# Altium PCB TK104_Pulsbegrenser_Eurorack_faderboard.PcbDoc
Units mm, origin at the board's own origin, x right, y up, seen from the top; angles counter-clockwise.
Board outline 15.5 x 62 mm, 2 copper layers (Top Layer, Bottom Layer), stack 1.871 mm thick; 1 components, 4 nets, 10 pads, 1 vias.
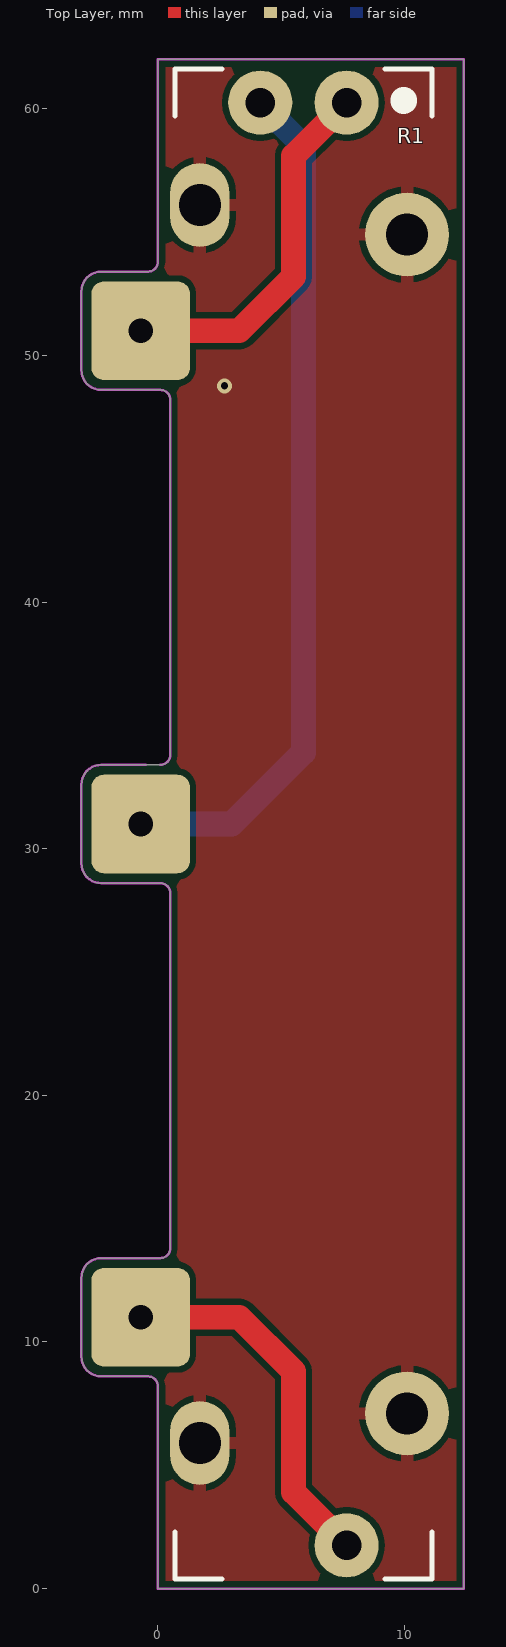
[diagram p0: Top Layer view]
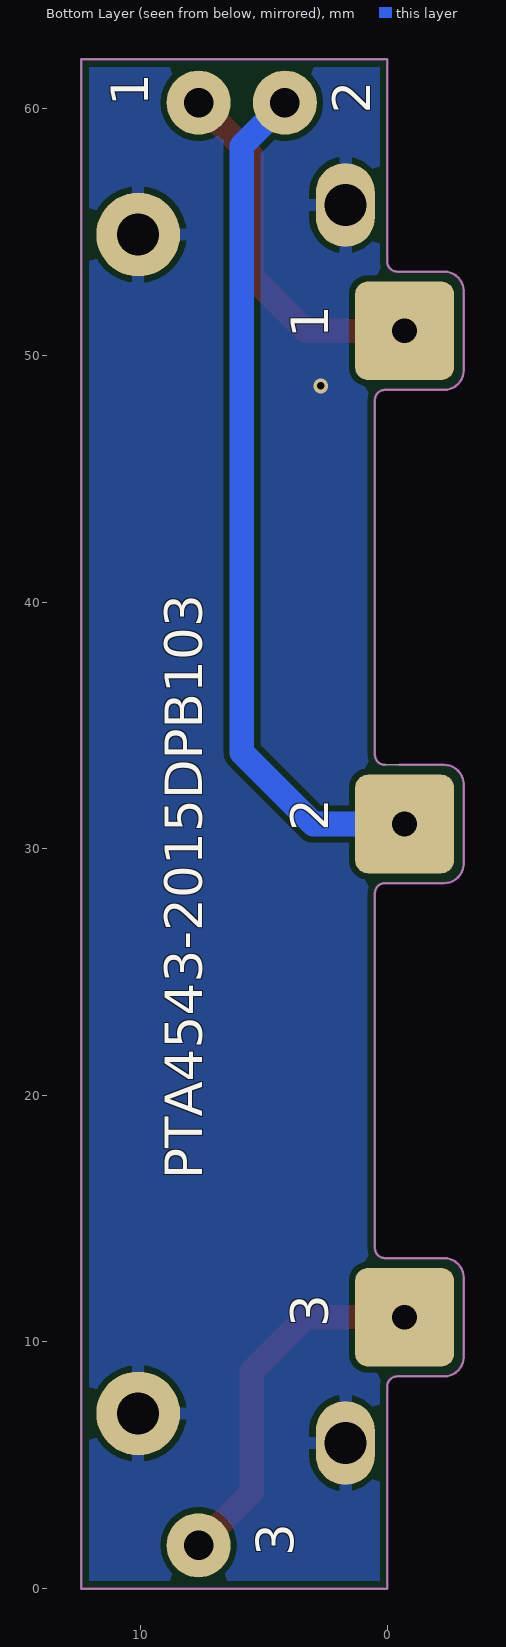
[diagram p1: Bottom Layer view, seen from below]

## Layer stack, top to bottom
Top Solder: solder mask 0.0102, Solder Resist, Dk 3.5
Top Layer: signal copper 0.0356
Dielectric 1: dielectric 1.8, FR-4, Dk 4.8
Bottom Layer: signal copper 0.0356
Bottom Solder: solder mask 0.0102, Solder Resist, Dk 3.5

## Board outline
-2.3,8.6 cw(c-2.3,9.4) -3.1,9.4 -3.1,12.6 cw(c-2.3,12.6) -2.3,13.4 0.1,13.4 ccw(c0.1,13.8) 0.5,13.8 0.5,28.2 ccw(c0.1,28.2) 0.1,28.6 -2.3,28.6 cw(c-2.3,29.4) -3.1,29.4 -3.1,32.6 cw(c-2.3,32.6) -2.3,33.4 0.1,33.4 ccw(c0.1,33.8) 0.5,33.8 0.5,48.2 ccw(c0.1,48.2) 0.1,48.6 -2.3,48.6 cw(c-2.3,49.4) -3.1,49.4 -3.1,52.6 cw(c-2.3,52.6) -2.3,53.4 -0.4,53.4 ccw(c-0.4,53.8) 0,53.8 0,62 12.4,62 12.4,0 0,0 0,8.2 ccw(c-0.4,8.2) -0.4,8.6

## Design rules (kind name [scope] priority, off if disabled: settings)
Clearance [All] p1: gap=0.254 ignorepadtopadclearanceinfootprint=FALSE except(0: Arc-Hole Track-Hole SMDPad-Hole THPad-Hole Via-Hole Fill-Hole Poly-Hole Region-Hole Text-Hole)
PolygonConnect PolygonConnect_VIA [InNet('SHIELD') vs IsVia] p1: connectstyle=Direct reliefconductorwidth=0.5 reliefentries=4 polygonreliefangle="90 Angle" airgapwidth=0.254
PolygonConnect [All] p2: connectstyle=Relief reliefconductorwidth=0.5 reliefentries=4 polygonreliefangle="90 Angle" airgapwidth=0.254
RoutingVias [All] p1: holewidth=0.3 width=0.6 viastyle="Through Hole" minholewidth=0.2 minwidth=0.2 maxholewidth=5 maxwidth=400
SolderMaskExpansion [All] p1: expansion=0.102
Width [All] p1: maxlimit=600 minlimit=0.25 preferedwidth=0.4
30 further rules are at their usual default settings.

## Components (designator, comment, footprint, x,y, rotation, side; value= is the part's Value field where it differs from the comment)
R1 "=navn" PTA4543-2015DPB103 5.9,31 r270 top

## Footprints (in the part's own frame and the unit in brackets; to place one, negate y for a bottom-side part, rotate by r counter-clockwise, add the part's x,y. Pads: shape width x height; smd on the part's side, far side on the other; paste and mask are expansions set on the pad)
PTA4543-2015DPB103 [mm] "Potentiometer, Slide, 10 kohm, 250 mW, ± 20%, PTA Series, Linear"
  oval 3.4x2.4 hole 1.7: 0(-25.1,-4.2) 0(25.1,-4.2)
  round 3.4 hole 1.7: 0(-23.9,4.2) 0(23.9,4.2)
  round 2.6 hole 1.2: 1(-29.25,1.75) 2(-29.25,-1.75) 3(29.25,1.75)
  silkscreen extent -30.61,-5.21 30.61,5.21, body extent -30,-4.65 30,4.65, height 21.5

## Part data
R1: library part Potmeter

## Free pads (board coordinates)
  rrect25% 4x4 hole 1: 1(-0.7,51) 2(-0.7,31) 3(-0.7,11)

## Via types
v1: diameter 0.6, hole 0.3, Top Layer to Bottom Layer, tented both sides, 1 vias

## Nets (pads, with @x,y where several pads share a name; then routed paths per layer and width w, separated by ;. In a path a pad name is that pad's centre, name@x,y a point inside that pad or via, vN(x,y) a via of type N, cw(c..) or ccw(c..) an arc to the next point about the centre after c; other vN are vias at no path point)
1: pad.1 R1.1 | length 15.1
  Top Layer w1: pad.1 3.3,51 5.5,53.2 5.5,58.1 R1.1
2: pad.2 R1.2 | length 34.9
  Bottom Layer w1: pad.2 3,31 5.9,33.9 5.9,58.5 R1.2
3: pad.3 R1.3 | length 15.1
  Top Layer w1: pad.3 3.3,11 5.5,8.8 5.5,3.9 R1.3
SHIELD: R1.0
  other v1: 2.7,48.765

## Polygon pours and split planes (outlines as drawn)
SHIELD on Bottom Layer "SHIELD_L02_P000" (solid, pour order 0): -0.5,62 12.4,62 12.4,0 -0.5,0 -0.5,13.4 -0.1,13.4 -0.1,48.6 -0.5,49
SHIELD on Top Layer "SHIELD_L01_P002" (solid, pour order 2): -0.5,62 12.4,62 12.4,0 -0.5,0 -0.5,13.4 -0.1,13.4 -0.1,48.6 -0.5,49

## Keep-outs
Keep-Out Layer:
  lines w0.1: -0.5,33.4 -2.3,33.4 ccw(c-2.3,32.6) -3.1,32.6 -3.1,29.4 ccw(c-2.3,29.4) -2.3,28.6 0.1,28.6 cw(c0.1,28.2) 0.5,28.2 0.5,13.8 cw(c0.1,13.8) 0.1,13.4 -2.3,13.4 ccw(c-2.3,12.6) -3.1,12.6 -3.1,9.4 ccw(c-2.3,9.4) -2.3,8.6 ; 0.1,33.4 ccw(c0.1,33.8) 0.5,33.8 0.5,48.2 ccw(c0.1,48.2) 0.1,48.6 -2.3,48.6 cw(c-2.3,49.4) -3.1,49.4 -3.1,52.6 cw(c-2.3,52.6) -2.3,53.4 -0.4,53.4 ccw(c-0.4,53.8) 0,53.8 0,62 12.4,62 12.4,0 0,0 0,8.2 ccw(c-0.4,8.2) -0.4,8.6 -2.3,8.6 ; -2.3,8.6 -2.3,8.6

## Silkscreen, mask and mechanical layers (free items; w line width, h text height)
Bottom Overlay:
  text "1" at 9.7,60.1 h1.52 r270
  text "2" at 0.7,59.8 h1.52 r270
  text "1" at 2.4,50.7 h1.52 r270
  text "2" at 2.4,30.7 h1.52 r270
  text "PTA4543-2015DPB103" at 7.5,16.6 h1.52 r270
  text "3" at 2.4,10.6 h1.52 r270
  text "3" at 3.8,1.3 h1.52 r270
Mechanical 1:
  lines w0.1: -2.3,8.6 cw(c-2.3,9.4) -3.1,9.4 -3.1,12.6 cw(c-2.3,12.6) -2.3,13.4 0.1,13.4 ccw(c0.1,13.8) 0.5,13.8 0.5,28.2 ccw(c0.1,28.2) 0.1,28.6 -2.3,28.6 cw(c-2.3,29.4) -3.1,29.4 -3.1,32.6 cw(c-2.3,32.6) -2.3,33.4 0.1,33.4 ccw(c0.1,33.8) 0.5,33.8 0.5,48.2 ccw(c0.1,48.2) 0.1,48.6 -2.3,48.6 cw(c-2.3,49.4) -3.1,49.4 -3.1,52.6 cw(c-2.3,52.6) -2.3,53.4 -0.4,53.4 ccw(c-0.4,53.8) 0,53.8 0,62 12.4,62 12.4,0 0,0 0,8.2 ccw(c-0.4,8.2) -0.4,8.6 -2.3,8.6 ; -2.3,8.6 -2.3,8.6